# Altium PCB PCB1.2.PcbDoc (part 1 of 2)
Units mil, origin at the board's own origin, x right, y up, seen from the top; angles counter-clockwise.
Board outline 1692.91 x 1692.91 mil, 4 copper layers (Top Layer, Mid-Layer 1, Mid-Layer 2, Bottom Layer); 152 components, 107 nets, 552 pads, 236 vias.
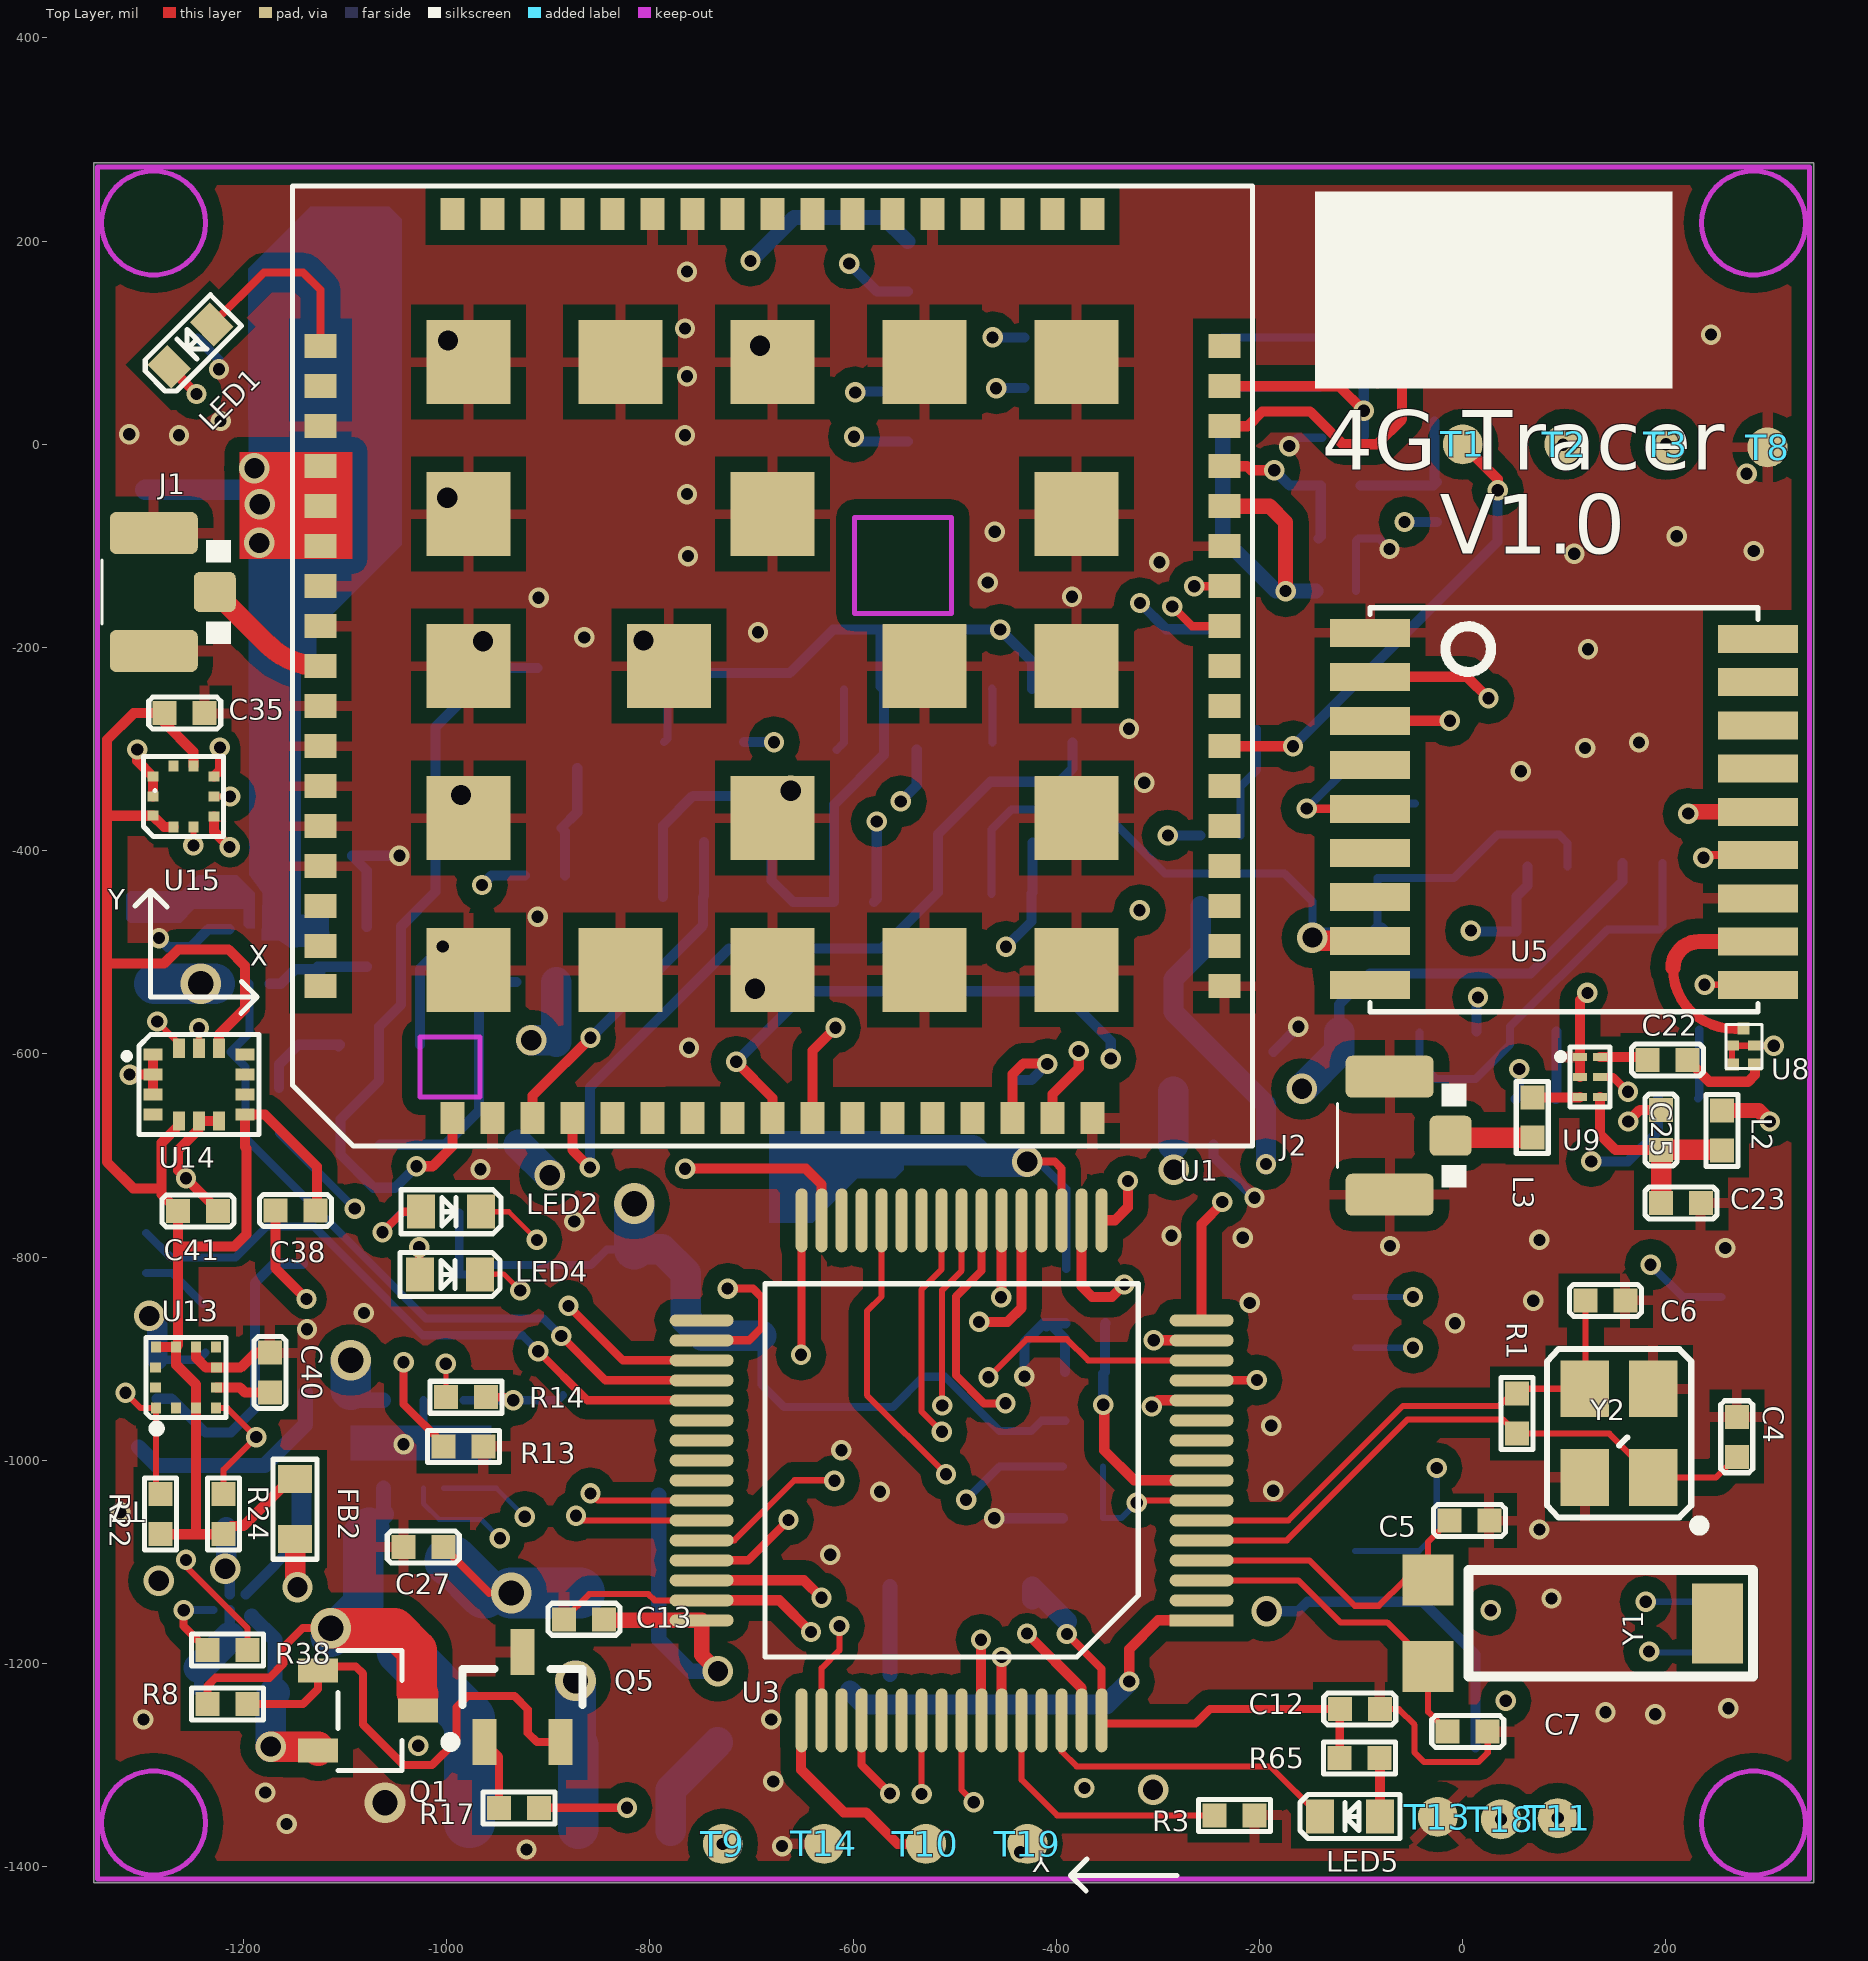
[diagram p0: Top Layer view]
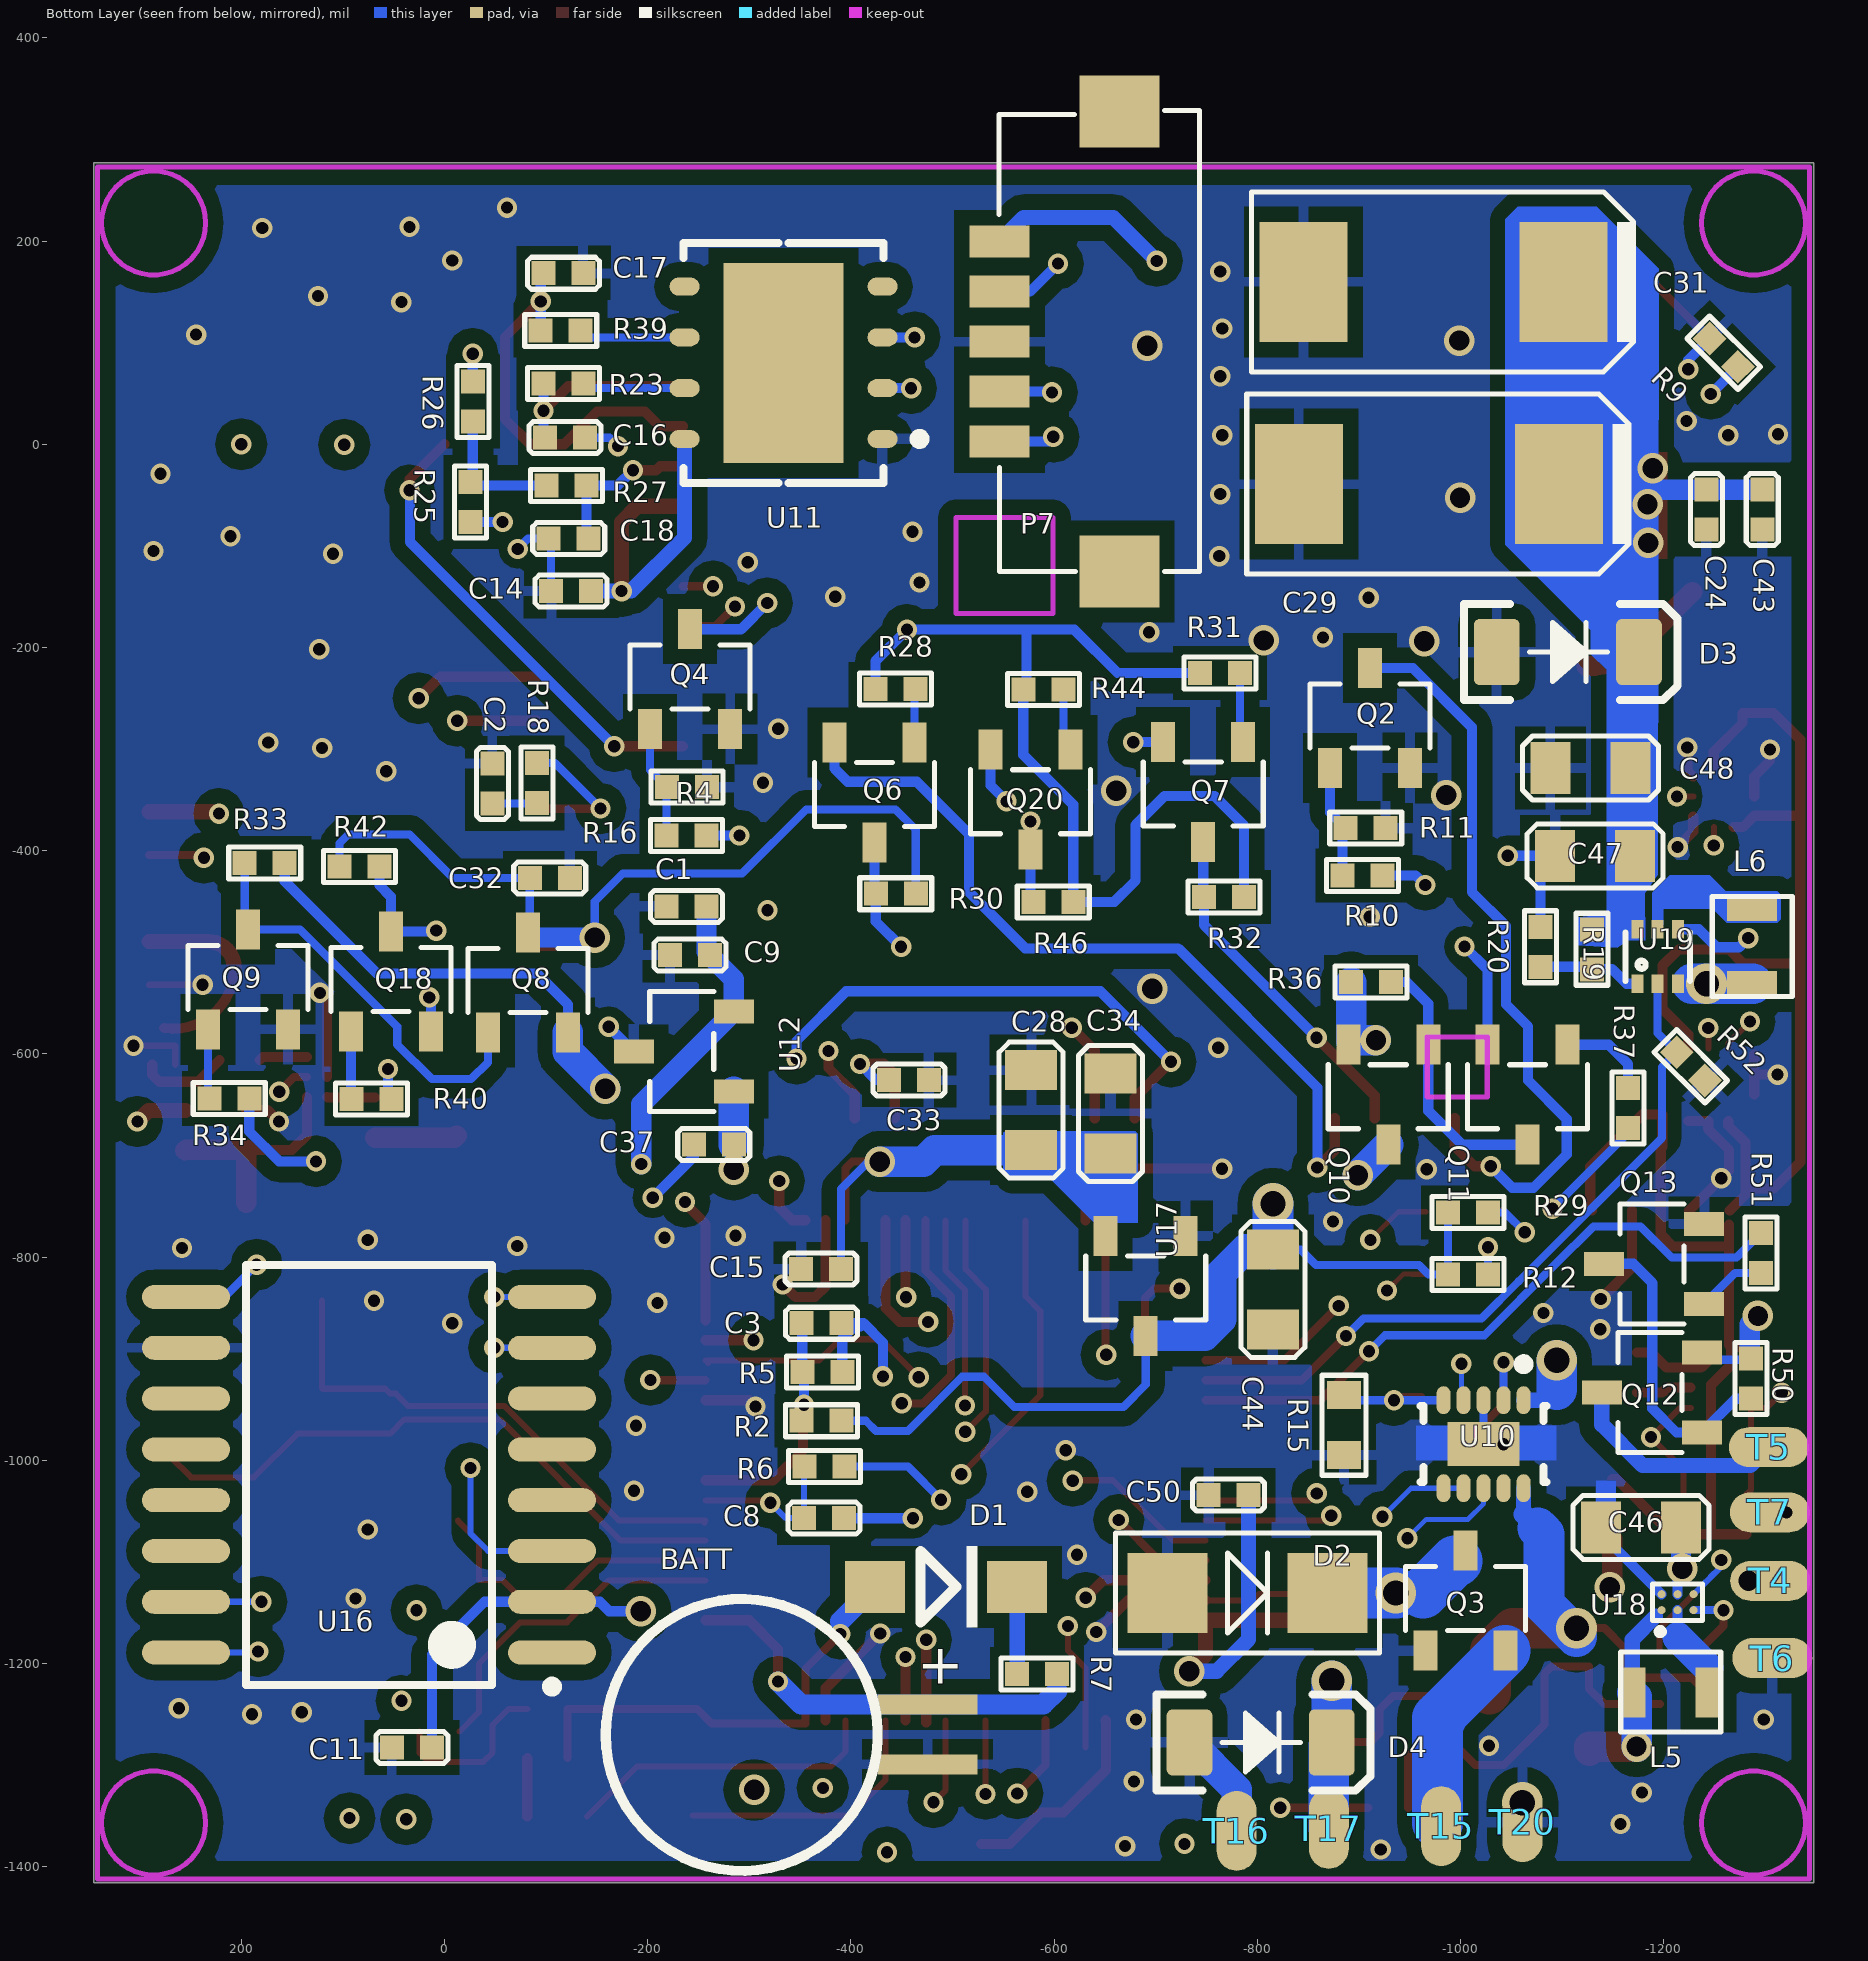
[diagram p1: Bottom Layer view, seen from below]
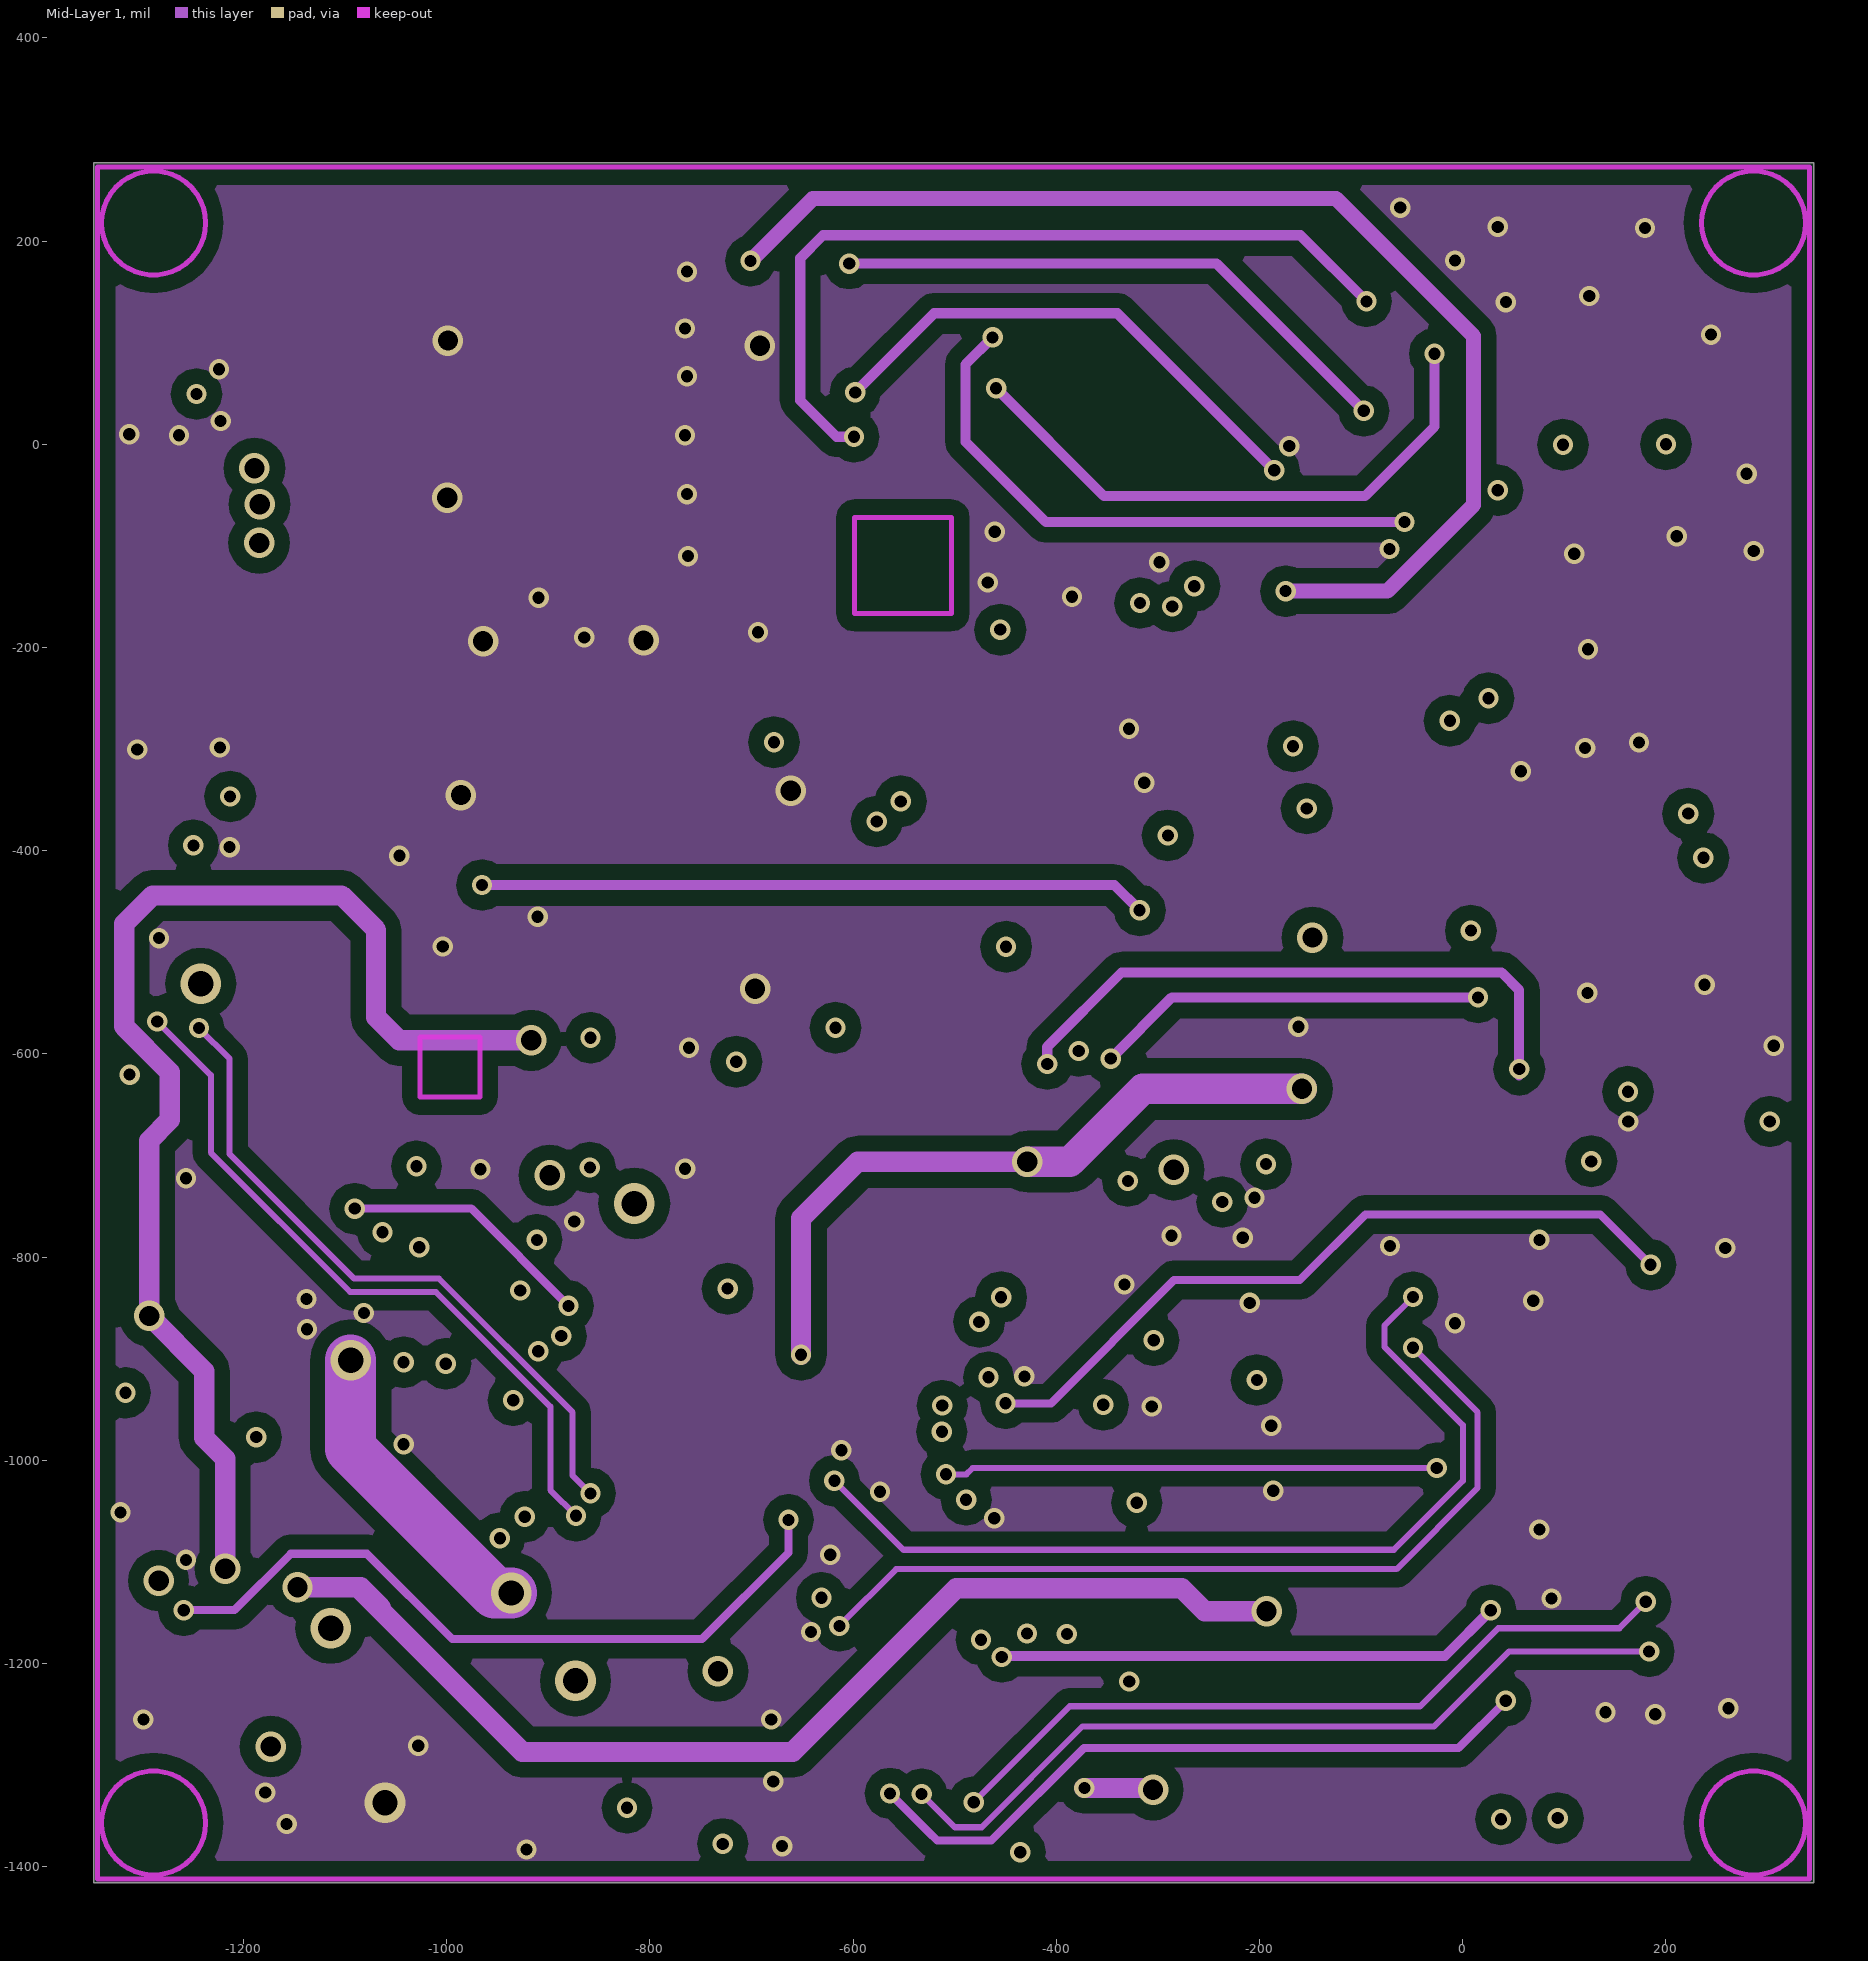
[diagram p2: Mid-Layer 1]
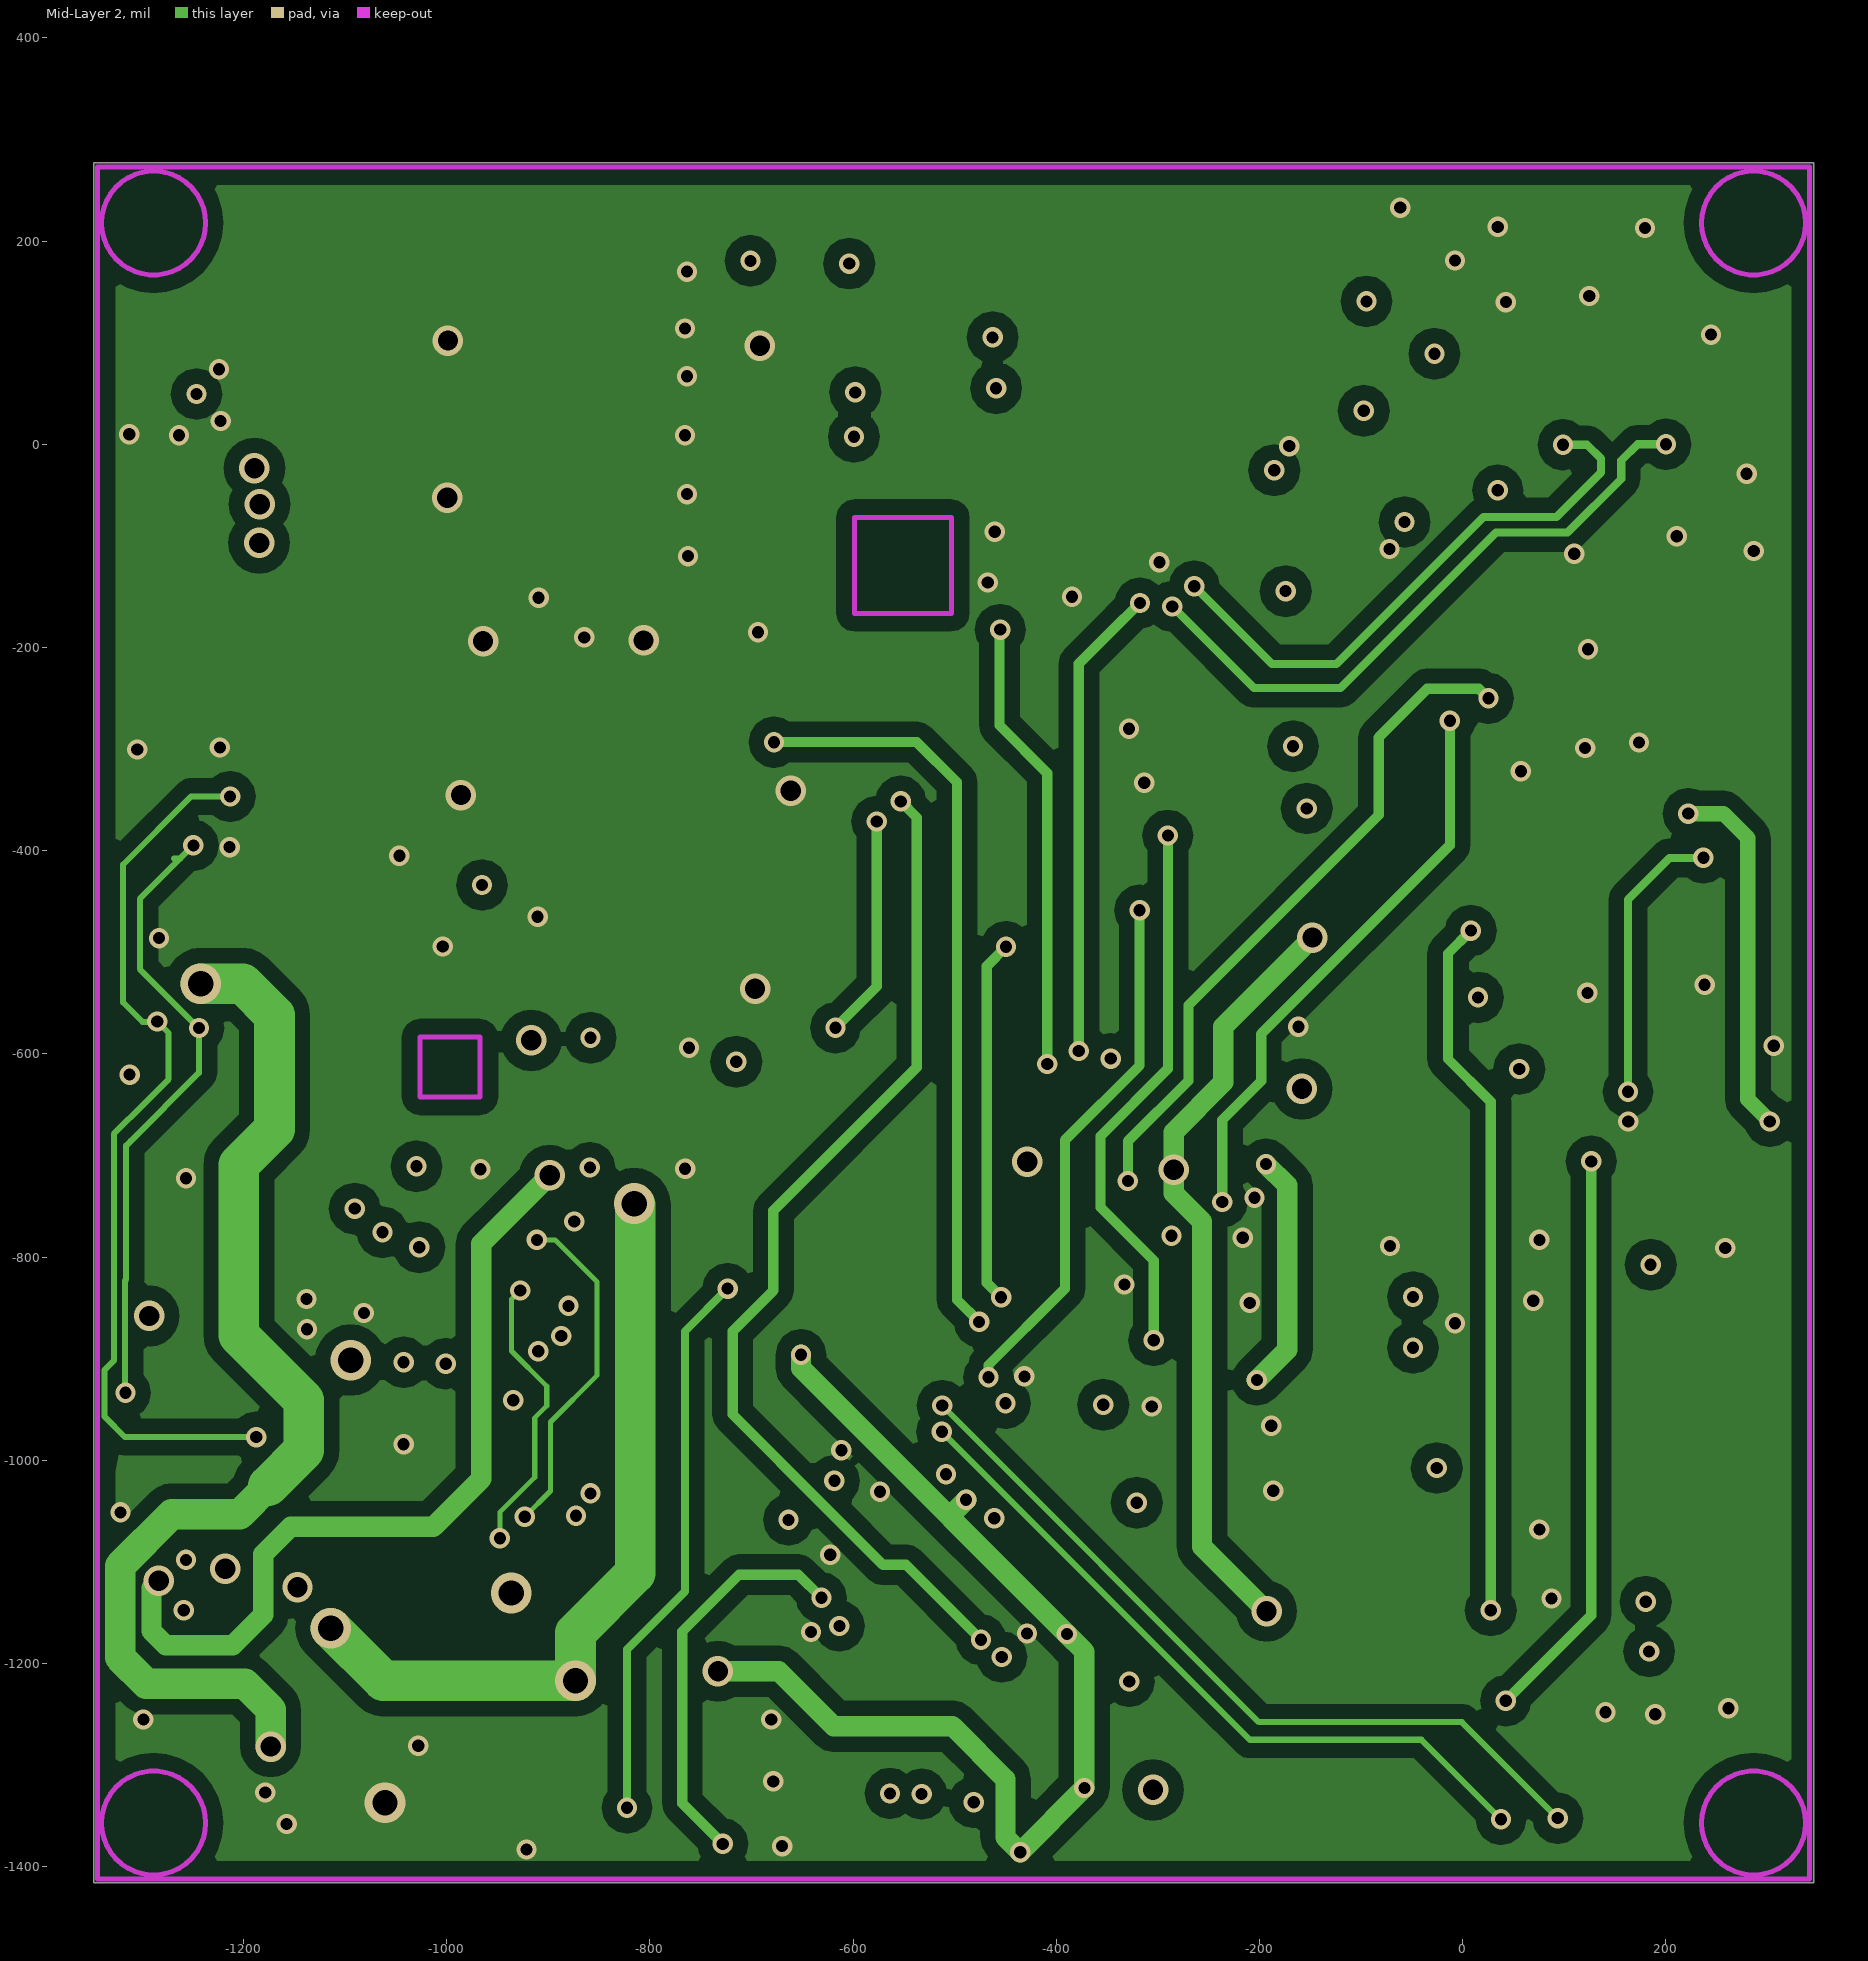
[diagram p3: Mid-Layer 2]

## Layer stack, top to bottom
Top Layer: signal copper 1.4
Dielectric: core 12.6, FR-4, Dk 4.8
Mid-Layer 1: signal copper 1.4
Dielectric: prepreg 12.6, FR-4, Dk 4.8
Mid-Layer 2: signal copper 1.4
Dielectric: core 12.6, FR-4, Dk 4.8
Bottom Layer: signal copper 1.4

## Board outline
-1347.58,-1416.02 -1347.58,276.89 345.33,276.89 345.33,-1416.02

## Design rules (kind name [scope] priority, off if disabled: settings)
Clearance [InPolygon  And InNet(AGND)] p1: gap=15
Clearance Clearance_1 [All] p2: gap=5
HoleToHoleClearance [All] p1: gap=5 allowstackedmicrovias=TRUE
MinimumSolderMaskSliver [All] p1: minsoldermaskwidth=1
PolygonConnect PolygonConnect_1 [InNet('AGND') And IsVia] p1: connectstyle=Direct reliefconductorwidth=10 reliefentries=4 polygonreliefangle="90 Angle"
PolygonConnect [All] p2: connectstyle=Relief reliefconductorwidth=10 reliefentries=4 polygonreliefangle="90 Angle"
RoutingVias [All] p1: holewidth=28 width=50 viastyle="Through Hole" minholewidth=28 minwidth=50 maxholewidth=28 maxwidth=50
SilkToSilkClearance [All] p1: silktosilkclearance=5
SilkscreenOverComponentPads [All] p1: minsilkscreentomaskgap=1
SolderMaskExpansion [All] p1: expansion=4
Width [All] p1: maxlimit=200 minlimit=5 preferedwidth=10
24 further rules are at their usual default settings.

## Classes and differential pairs
component class sensors: C35 C38 C40 C41 FB2 R22 R24 U13 U14 U15
component class power: C1 C27 C28 C34 C37 C44 C46 C47 C48 D2 D4 L5 L6 LED2 LED4 Q1 Q3 Q5 Q8 Q9 Q10 Q11 Q12 Q13 R8 R12 R13 R14 R15 R17 R19 R20 R29 R33 R34 R36 R37 R38 R50 R51 R52 T4 T5 T6 T7 T15 T16 T17 T20 U10 U12 U17 U18 U19
component class GPS&&lte: C14 C16 C17 C18 C22 C24 C25 C26 C29 C30 C31 C33 C43 D3 J1 J2 L3 LED1 P7 Q2 Q6 Q7 Q18 Q19 Q20 Q21 R9 R10 R11 R23 R25 R26 R27 R28 R30 R31 R32 R39 R40 R41 R42 R43 R44 R45 R46 R47 T1 T2 T3 T8 U8 U9 U11
component class CPU: BATT C3 C4 C5 C6 C7 C8 C9 C11 C12 C13 C15 C50 D1 LED5 R1 R2 R3 R5 R6 R7 R65 T9 T10 T11 T13 T14 T18 T19 U3 U16 U? Y1 Y2
component class 4G: C2 C23 C32 L2 Q4 R4 R16 R18 U1 U5 U?

## Components (designator, comment, footprint, x,y, rotation, side; value= is the part's Value field where it differs from the comment)
BATT "MS621FE" MS621FE -475.57,-1269.81 r180 bottom
C1 "0.1uF/25V" 0402c -257.87,-454.74 r0 bottom
C2 "4.7uF/10V" 0402c -47.09,-314.22 r270 bottom
C3 "0.1uF/25v" 0402c -351.58,-865.06 r180 bottom
C4 "22pF" 0402c 269.7,-957.13 r270 top
C5 "6pF" 0402c -13.19,-1059.37 r0 top
C6 "22pF" 0402c 160.07,-842.55 r180 top
C7 "6pF" 0402c -14.78,-1267.08 r0 top
C8 "0.1uF/25V" 0402C -393.44,-1056.96 r0 bottom
C9 "0.1uF/25V" 0402C -221.79,-502.85 r180 bottom
C11 "0.1uF/25V" 0402C 51.78,-1282.7 r180 bottom
C12 "0.1uF/25V" 0402C -81.68,-1244.83 r180 top
C13 "0.1uF/25V" 0402C -884.59,-1156.45 r0 top
C14 "0.1uF" 0402C -104.98,-144.5 r180 bottom
C15 "0.1uF/25V" 0402C -350.96,-811.75 r180 bottom
C16 "10pF/NC" 0402C -138.35,6.52 r0 bottom
C17 "10pF/NC" 0402C -136.66,168.4 r0 bottom
C18 "10pF/NC" 0402C -102.61,-92.86 r180 bottom
C22 "36pF" 0402c 221.3,-606.07 r180 top
C23 "4.7uF" 0402c 234.38,-746.83 r180 top
C24 "10pF" 0402C -1242.06,-84.03 r90 bottom
C25 "0.1uF" 0402C 195.21,-655.1 r270 top
C27 "1uF/25V" 0402C -1003.45,-1085.29 r180 top
C28 "22uF/10V" 0805C -577.46,-694.71 r90 bottom
C29 "1000uF" 7343 -1096.76,-39.16 r0 bottom
C31 "1000uF" 7343 -1101.38,159.89 r0 bottom
C32 "10uF/10V" 0402C -123.35,-426.85 r0 bottom
C33 "0.1uF" 0402C -476.85,-625.78 r0 bottom
C34 "22uF/10V" 0805C -655.57,-698 r90 bottom
C35 "0.1uF/25V" 0402C -1238.21,-264.59 r180 top
C37 "0.1uF/25V" 0402c -284.73,-689.17 r0 bottom
C38 "0.1uF/25V" 0402C -1168.7,-754.17 r0 top
C40 "22pF" 0402c -1173.9,-933.37 r90 top
C41 "0.1uF/25V" 0402C -1225.02,-754.71 r180 top
C43 "33pF" 0402C -1297.06,-84.03 r90 bottom
C44 "22uF/10V" 0805C -815.28,-792.34 r270 bottom
C46 "22uF/10V" 0805C -1216.98,-1065.97 r0 bottom
C47 "22uF/10V" 0805C -1171.93,-405.02 r0 bottom
C48 "22uF/10V" 0805C -1167.25,-318.61 r0 bottom
C50 "0.1uF/25V" 0402C -751.95,-1034.23 r180 bottom
D1 "1N4148" DIODE_SOP -423.66,-1124.52 r180 bottom
D2 "SMAJ12CA" SMA -711.64,-1130.56 r180 bottom
D3 "DIODE_SCHOTTKY_0" LL-34(D1206) -1105.75,-204.44 r180 bottom
D4 "DIODE_SCHOTTKY_0" LL-34(D1206) -803.28,-1277.71 r180 bottom
FB2 "10R/1A" 0603R -1149.27,-1077.67 r90 top
J1 "IPEX" RF-UFL -1288.35,-145.35 r90 top
J2 "IPEX" RF-UFL -72.01,-680.51 r90 top
L2 "27nH" 0402R 255.01,-655.65 r270 top
L3 "LQW15A" 0402R 68.41,-643.04 r270 top
L5 "SRP4020TA-2R2M" L2520 -1169.15,-1228.55 r180 bottom
L6 "SRP4020TA-1R0M" L2520 -1286.8,-456.47 r270 bottom
LED1 "LED" 0603LED -1231.31,117.99 r225 top
LED2 "LED" 0603LED -1025.27,-755.35 r0 top
LED4 "LED" 0603LED -1026.16,-817.15 r0 top
LED5 "LED" 0603LED -81.42,-1350.52 r180 top
P7 "Header 5" 5×1.25mmSMT -546.3,2.66 r90 bottom
Q1 "WNM2016-3/TR" sot23-3 -1126.58,-1207.02 r180 top
Q2 "MMBT3904" SOT23-3 -871.62,-318.53 r270 bottom
Q3 "Si2369DS" sot23-3 -965.42,-1187.29 r270 bottom
Q4 "MMBT3904" SOT23-3 -202.4,-280.38 r270 bottom
Q5 "SOT23-3" SOT95P240-3N -925.58,-1233.02 r90 top
Q6 "MMBT3904" SOT23-3 -462.79,-293.42 r90 bottom
Q7 "MMBT3904" SOT23-3 -786.19,-293.16 r90 bottom
Q8 "Si2369DS" sot23-3 -42.76,-578.76 r270 bottom
Q9 "S8050" SOT23-3 232.77,-575.8 r270 bottom
Q10 "Si2369DS" sot23-3 -968.32,-590.95 r90 bottom
Q11 "S8050" SOT23-3 -1105.21,-590.95 r90 bottom
Q12 "Si2369DS" sot23-3 -1237.57,-972.6 r180 bottom
Q13 "S8050" SOT23-3 -1239.89,-845.97 r180 bottom
Q18 "MMBT3904" SOT23-3 92.15,-577.82 r270 bottom
Q20 "MMBT3904" SOT23-3 -616.15,-300.63 r90 bottom
R1 "1MR" 0402R 53.39,-973.71 r90 top
R2 "10K/1%" 0402R -390.95,-961.06 r0 bottom
R3 "100K" 0402R -244.15,-1349.45 r0 top
R4 "47K" 0402R -219.17,-337.27 r180 bottom
R5 "10K/1%" 0402R -352.21,-913.06 r180 bottom
R6 "10K" 0402R -393.74,-1006.04 r0 bottom
R7 "470" 0402R -563.66,-1210.52 r180 bottom
R8 "4K7" 0402R -1235.58,-1240.02 r0 top
R9 "1K" 0402R -1273.07,76.23 r45 bottom
R10 "4.7K" 0402R -883.74,-424.24 r180 bottom
R11 "47K" 0402R -887.09,-377.67 r180 bottom
R12 "1K/1%" 0402R -987.76,-817.15 r180 bottom
R13 "3.95K/1%" 0402R -1003.17,-986.41 r0 top
R14 "21.5k/1%" 0402R -961.55,-937.9 r180 top
R15 "RTH103AT" 0603R -885.49,-995.01 r90 bottom
R16 "4.7K" 0402R -218.7,-384.95 r180 bottom
R17 "4K7" 0402R -948.58,-1342.02 r0 top
R18 "10K" 0402R -91.14,-313.51 r270 bottom
R19 "534K/1%" 0402R -1129.48,-477.32 r270 bottom
R20 "100K/1%" 0402R -1078.73,-474.85 r270 bottom
R22 "4.7K" 0402R -1281.6,-1072.72 r90 top
R23 "10R" 0402R -97.49,59.69 r180 bottom
R24 "4.7K" 0402R -1219.6,-1033.35 r270 top
R25 "0R" 0402R -25.52,-76.52 r90 bottom
R26 "0R" 0402R -27.89,61.86 r270 bottom
R27 "10R" 0402R -139.72,-40.44 r0 bottom
R28 "4.7K" 0402R -463.46,-240.63 r0 bottom
R29 "1K/1%" 0402R -987.76,-756.15 r180 bottom
R30 "10K" 0402R -424.51,-442.32 r180 bottom
R31 "4.7K" 0402R -782.85,-225.07 r0 bottom
R32 "4.7K" 0402R -747.66,-445.55 r180 bottom
R33 "4K7" 0402R 157.24,-412.12 r0 bottom
R34 "4K7" 0402R 231.51,-643.8 r180 bottom
R36 "4K7" 0402R -892.3,-529.38 r180 bottom
R37 "4K7" 0402R -1165.03,-633.64 r270 bottom
R38 "10K/1%" 0402R -1195.98,-1186.52 r180 top
R39 "10R" 0402R -94.76,112.2 r180 bottom
R40 "4.7K" 0402R 91.51,-644.49 r180 bottom
R42 "10K" 0402R 63.87,-415.57 r0 bottom
R44 "4.7K" 0402R -609.11,-241.36 r0 bottom
R46 "4.7K" 0402R -579.54,-450.37 r180 bottom
R50 "4K7" 0402R -1285.84,-900 r270 bottom
R51 "4K7" 0402R -1295.73,-815.68 r90 bottom
R52 "10K/1%" 0402R -1240.67,-626.09 r45 bottom
R65 "1K" 0402R -81.75,-1293.1 r180 top
T1 "TPD" TPD#1 0,0 r90 top
T2 "TPD" TPD#2 73.67,-3 r90 top
T3 "TPD" TPD#3 132.33,-3 r90 top
T4 "TPD" TP#1 -1304.86,-1118.62 r180 top
T5 "TPD" TP#1 -1303.53,-987 r180 top
T6 "TPD" TP#1 -1307.01,-1194.59 r0 top
T7 "TPD" TP#1 -1304.42,-1051.19 r180 top
T8 "TPD" TPD#4 191,-3 r90 top
T9 "TPD" TPd#1 -728.35,-1377.55 r90 top
T10 "TPD" TPd#2 -617.51,-1379.33 r270 top
T11 "TPD" TPd#1 93.44,-1352.16 r135 top
T13 "TPD" TPd#1 -24.55,-1350.9 r135 top
T14 "TPD" TPd#3 -669.91,-1379.76 r270 top
T15 "TPD" TP#1 -980.96,-1360.07 r270 top
T16 "TPD" TP#1 -779.68,-1364.69 r270 top
T17 "TPD" TP#2 -870.44,-1362.68 r270 bottom
T18 "TPD" TPd#1 37.57,-1353.31 r135 top
T19 "TPD" TPd#4 -560.97,-1380.16 r135 top
T20 "TPD" TP#1 -1061.08,-1355.95 r270 top
U1 "A7670" A7670 -679.35,-218.39 r90 top
U3 "stm32l412r8t6" LQFP-64 -257.01,-1157.48 r180 top
U5 "SIM868E/SIM68" SIM68MB -91.14,-185.51 r0 top
U8 "SAFFB1G56KB0F0A" SAFFB1G56KB0F0A 276.31,-575.19 r270 top
U9 "AW5005DNR" AW5005 125.36,-622.78 r0 top
U10 "bq24210" QFN50P200X300X80-10N -1022.79,-984.15 r270 bottom
U11 "SLI76CF3600P" QFN127P500X600X80-8N -333.75,80.27 r0 bottom
U12 "REF3025AIDBZR" SOT23-3 -284.73,-637.17 r180 bottom
U13 "LIS2MDL" LIS2MDL -1256.56,-918.65 r90 top
U14 "LSM6DS3TR" LSM6DS3TR-C -1243.94,-630.24 r0 top
U15 "BMP388" BMP388 -1259.21,-346.59 r180 top
U16 "MX25L51245GMI-10G" SOP127P1030X239-16N 74.3,-1014.25 r0 bottom
U17 "MCP33-30" SOT23-3 -729.58,-779.02 r90 bottom
U18 "TPS610997YFFR" TPS610997YFFR -1213.65,-1139.63 r90 bottom
U19 "TPS61023" SOT563-6 -1194.01,-504.33 r180 bottom
Y1 "MC-146 32.768K/6pF" 32.768K -34.18,-1202.91 r90 top
Y2 "8MHz" OSCILLATOR-3.2X2.5 154.07,-973.55 r90 top

## Footprints (in the part's own frame and the unit in brackets; to place one, negate y for a bottom-side part, rotate by r counter-clockwise, add the part's x,y. Pads: shape width x height; smd on the part's side, far side on the other; paste and mask are expansions set on the pad)
5×1.25mmSMT [mm]
  rect 1.8x2 smd: 0(-3.25,-3) 0(8.25,-3)
  rect 0.8x1.5 smd: 1(0,0) 2(1.25,0) 3(2.5,0) 4(3.75,0) 5(5,0)
  round 0.5 on Bottom Overlay: ""(-0.875,0.432)
  silkscreen extent -3.25,-5 8.28,0.02
32.768K [mil]
  rect 50x50 smd: 1(0,0) 2(85,0)
  rect 78.74x50 smd: 3(42.13,-285)
  silkscreen extent -10,-320 95,-40
0402c [mm]
  rect 0.6x0.6 smd: 1(0,0) 2(1,0)
  silkscreen extent -0.4,-0.4 1.4,0.4
0402C [mm]
  rect 0.6x0.6 smd: 1(0,0) 2(1,0)
  silkscreen extent -0.4,-0.4 1.4,0.4
0402R [mm]
  rect 0.6x0.6 smd: 1(0,0) 2(1,0)
  silkscreen extent -0.4,-0.4 1.4,0.4
0603LED [mm]
  rect 0.7x0.85 smd: 1(0,0) 2(1.5,0)
  silkscreen extent -0.5,-0.55 2,0.55
0603R [mm]
  rect 0.7x0.85 smd: 1(0,0) 2(1.5,0)
  silkscreen extent -0.5,-0.55 2,0.55
0805C [mm]
  rect 1x1.3 smd: 1(0,0) 2(2,0)
  silkscreen extent -0.7,-0.8 2.7,0.8
7343 [mm]
  rect 2.2x3 smd: 1(0,0) 2(6.5,0)
  silkscreen extent -1.75,-2.25 7.8,2.25
A7670 [mm]
  rect 0.8x0.6 smd: 1(-11.3,8) 2(-11.3,7) 3(-11.3,6) 4(-11.3,5) 5(-11.3,4) 6(-11.3,3) 7(-11.3,2) 8(-11.3,1) 9(-11.3,0) 10(-11.3,-1) 11(-11.3,-2) 12(-11.3,-3) 13(-11.3,-4) 14(-11.3,-5) 15(-11.3,-6) 16(-11.3,-7) 17(-11.3,-8) 35(11.3,-8) 36(11.3,-7) 37(11.3,-6) 38(11.3,-5) 39(11.3,-4) 40(11.3,-3) 41(11.3,-2) 42(11.3,-1) 43(11.3,0) 44(11.3,1) 45(11.3,2) 46(11.3,3) 47(11.3,4) 48(11.3,5) 49(11.303,6) 50(11.3,7) 51(11.3,8)
  rect 0.6x0.8 smd: 18(-8,-11.3) 19(-7,-11.3) 20(-6,-11.3) 21(-5,-11.3) 22(-4,-11.3) 23(-3,-11.3) 24(-2,-11.3) 25(-1,-11.3) 26(0,-11.3) 27(1,-11.3) 28(2,-11.3) 29(3,-11.3) 30(4,-11.3) 31(5,-11.3) 32(6,-11.3) 33(7,-11.3) 34(8,-11.3) 52(8,11.3) 53(7,11.3) 54(6,11.3) 55(5,11.3) 56(4,11.3) 57(3,11.3) 58(2,11.3) 59(1,11.3) 60(0,11.3) 61(-1,11.3) 62(-2,11.3) 63(-3,11.3) 64(-4,11.3) 65(-5,11.3) 66(-6,11.3) 67(-7,11.3) 68(-8,11.3)
  rect 2.1x2.1 smd: 69(-7.6,7.6) 70(-7.6,3.8) 71(-7.6,0) 72(-7.6,-3.8) 73(-7.6,-7.6) 74(-3.8,-7.6) 75(0,-7.6) 76(3.8,-7.6) 77(7.6,-7.6) 78(7.6,-3.8) 79(7.6,0) 80(7.6,3.8) 81(7.6,7.6) 82(3.8,7.6) 83(0,7.6) 84(-3.8,7.6) 85(-3.8,0) 86(0,-3.8) 87(3.8,0) 88(0,2.591)
  Keep-Out Layer lines w0.127: 1.321,-2.045 3.721,-2.045 ; 1.321,-2.07 1.321,-4.47 3.721,-4.47 3.721,-2.07 ; -10.77,8.814 -10.77,7.314 -9.27,7.314 -9.27,8.814 -10.77,8.814
  silkscreen extent -12,-12 12,12
AW5005 [mm]
  rect 0.35x0.2 smd: 1(-0.25,0.5) 2(-0.25,0) 3(-0.25,-0.5) 4(0.25,-0.5) 5(0.25,0) 6(0.25,0.5)
  silkscreen extent -0.77,-0.75 0.5,0.75
BMP388 [mm]
  rect 0.25x0.275 smd: 1(0.25,0.763) 2(-0.25,0.763) 6(-0.25,-0.763) 7(0.25,-0.763)
  rect 0.275x0.25 smd: 3(-0.762,0.5) 4(-0.762,0) 5(-0.762,-0.5) 8(0.763,-0.5) 9(0.763,0) 10(0.763,0.483)
  silkscreen extent -1,-1 1,1
DIODE_SOP [mm]
  rect 1.5x1.3 smd: 1(0,0) 2(3.556,0)
  silkscreen extent 1.14,-1.02 2.56,1.02
L2520 [mm]
  rect 0.65x1.25 smd: 1(0,0) 2(1.9,0)
  silkscreen extent -0.29,-0.99 2.21,1.01
LIS2MDL [mm]
  rect 0.275x0.25 smd: 1(-0.763,0.75) 2(-0.763,0.25) 3(-0.763,-0.25) 4(-0.763,-0.75) 7(0.763,-0.75) 8(0.763,-0.25) 9(0.763,0.25) 10(0.763,0.75)
  rect 0.25x0.275 smd: 5(-0.25,-0.763) 6(0.25,-0.763) 11(0.25,0.762) 12(-0.25,0.762)
  silkscreen extent -1.35,-1 1,1
LL-34(D1206) [mil]
  rrect25% 45x65 smd: 1(-70,0) 2(70,0)
  silkscreen extent -102,-47 108,47, body extent -70,-28 68,30, height 56
LQFP-64 [mm]
  rect 1.6x0.3 smd: 1(0,0)
  oval 1.6x0.3 smd: 2(0,-0.5) 3(0,-1) 4(0,-1.5) 5(0,-2) 6(0,-2.5) 7(0,-3) 8(0,-3.5) 9(0,-4) 10(0,-4.5) 11(0,-5) 12(0,-5.5) 13(0,-6) 14(0,-6.5) 15(0,-7) 16(0,-7.5) 33(12.5,-7.5) 34(12.5,-7) 35(12.5,-6.5) 36(12.5,-6) 37(12.5,-5.5) 38(12.5,-5) 39(12.5,-4.5) 40(12.5,-4) 41(12.5,-3.5) 42(12.5,-3) 43(12.5,-2.5) 44(12.5,-2) 45(12.5,-1.5) 46(12.5,-1) 47(12.5,-0.5) 48(12.5,0)
  oval 0.3x1.6 smd: 17(2.5,-10) 18(3,-10) 19(3.5,-10) 20(4,-10) 21(4.5,-10) 22(5,-10) 23(5.5,-10) 24(6,-10) 25(6.5,-10) 26(7,-10) 27(7.5,-10) 28(8,-10) 29(8.5,-10) 30(9,-10) 31(9.5,-10) 32(10,-10) 49(10,2.5) 50(9.5,2.5) 51(9,2.5) 52(8.5,2.5) 53(8,2.5) 54(7.5,2.5) 55(7,2.5) 56(6.5,2.5) 57(6,2.5) 58(5.5,2.5) 59(5,2.5) 60(4.5,2.5) 61(4,2.5) 62(3.5,2.5) 63(3,2.5) 64(2.5,2.5)
  silkscreen extent 1.59,-8.41 10.91,0.91
LSM6DS3TR-C [mm]
  rect 0.48x0.3 smd: 1(-1.15,0.75) 2(-1.15,0.25) 3(-1.15,-0.25) 4(-1.15,-0.75) 8(1.15,-0.75) 9(1.15,-0.25) 10(1.15,0.25) 11(1.15,0.75)
  rect 0.3x0.48 smd: 5(-0.5,-0.91) 6(0,-0.91) 7(0.5,-0.91) 12(0.5,0.91) 13(0,0.91) 14(-0.5,0.91)
  silkscreen extent -1.83,-1.25 1.5,1.25
MS621FE [mm]
  rect 2.5x0.5 smd: 1(0,-0.749) 2(0,0.749)
  silkscreen extent -8.05,-3.41 -1.25,3.39
OSCILLATOR-3.2X2.5 [mil] "OSCILLATOR-3.2X2.5"
  rect 56x48 smd: 1(-43.31,-33.46) 2(44,-33.46) 3(44,34) 4(-43.31,34)
  silkscreen extent -95,-83 83,71
QFN50P200X300X80-10N [mm] "QFN, 10-Leads, Body 2.9x1.9mm (max), Pitch 0.50mm, IPC Medium Density"
  oval 0.7x0.35 smd: 1(-1.1,1) 2(-1.1,0.5) 3(-1.1,0) 4(-1.1,-0.5) 5(-1.1,-1) 6(1.1,-1) 7(1.1,-0.5) 8(1.1,0) 9(1.1,0.5) 10(1.1,1)
  rect 1.1x1.8 smd: 11(0,0)
  silkscreen extent -2.12,-1.58 0.95,1.58, body extent -0.95,-1.45 0.95,1.45, height 0.8
QFN127P500X600X80-8N [mm] "QFN, 8-Leads, Body 6.0x5.0mm (max), Pitch 1.27mm, IPC Medium Density"
  oval 0.75x0.45 smd: 1(-2.475,1.905) 2(-2.475,0.635) 3(-2.475,-0.635) 4(-2.475,-1.905) 5(2.475,-1.905) 6(2.475,-0.635) 7(2.475,0.635) 8(2.475,1.905)
  rect 3x5 smd: 9(0,0)
  silkscreen extent -3.52,-3 2.5,3
RF-UFL [mm]
  rrect30% 1x1.05 smd: 1(0,-1.525)
  rrect30% 1.05x2.2 smd: 2(-1.475,0) 2(1.475,0)
  silkscreen extent -1.3,-1.93 1.3,1.3, body extent -1.7,-1.55 1.7,1.55, height 1.25
SAFFB1G56KB0F0A [mm]
  rect 0.3x0.3 smd: 1(0,0)
  rect 0.25x0.35 smd: 2(0.425,-0.287) 5(0.425,0.288)
  rect 0.3x0.35 smd: 3(0.9,-0.287) 4(0.9,0.288)
  silkscreen extent -0.1,-0.44 1,0.46
SIM68MB [mm]
  rect 2x0.7 smd: 1(0,0) 2(0,-1.1) 3(0,-2.2) 4(0,-3.3) 5(0,-4.4) 6(0,-5.5) 7(0,-6.6) 8(0,-7.7) 9(0,-8.8) 10(9.7,-8.8) 11(9.7,-7.719) 12(9.7,-6.638) 13(9.7,-5.557) 14(9.7,-4.476) 15(9.7,-3.395) 16(9.7,-2.314) 17(9.7,-1.233) 18(9.7,-0.152)
  silkscreen extent 0,-9.47 9.7,0.63
SMA [mm]
  rect 2x2 smd: 1(0,0) 2(4,0)
  silkscreen extent -1.3,-1.5 5.3,1.5
SOP127P1030X239-16N [mm] "SOP, 16-Leads, Body 10.5x7.6mm (max), Pitch 1.27mm, IPC Medium Density"
  oval 2.2x0.6 smd: 1(-4.575,4.445) 2(-4.575,3.175) 3(-4.575,1.905) 4(-4.575,0.635) 5(-4.575,-0.635) 6(-4.575,-1.905) 7(-4.575,-3.175) 8(-4.575,-4.445) 9(4.575,-4.445) 10(4.575,-3.175) 11(4.575,-1.905) 12(4.575,-0.635) 13(4.575,0.635) 14(4.575,1.905) 15(4.575,3.175) 16(4.575,4.445)
  silkscreen extent -4.7,-5.25 3.07,5.42, body extent -3.8,-5.25 3.8,5.25, height 2.39
sot23-3 [mm]
  rect 1x0.6 smd: 1(0,0) 2(0,2) 3(-2.5,1)
  silkscreen extent -2.1,-0.5 -0.5,2.5
SOT23-3 [mm]
  rect 1x0.6 smd: 1(0,0) 2(0,2) 3(-2.5,1)
  silkscreen extent -2.1,-0.5 -0.5,2.5
SOT95P240-3N [mm] "SOT23, 3-Leads, Body 2.9x1.3mm, Pitch 0.95mm, Lead Span 2.4mm, IPC Medium Density"
  rect 1.15x0.6 smd: 1(-1.125,0.95) 2(-1.125,-0.95) 3(1.125,0)
  silkscreen extent -1.25,-1.5 0.7,1.92, body extent -0.7,-1.5 0.7,1.5, height 1.14
SOT563-6 [mil] "SOT563-6"
  rect 12x18 smd: 1(-19.68,-26.57) 2(0,-26.57) 3(20,-26.57) 4(20,27) 5(0,27) 6(-19.69,27)
  silkscreen extent -31,-24 32,24
TP#1 [mm]
  oval 2x1 smd far side: 1(0,0)
TP#2 [mm]
  oval 2x1 smd: 1(0,0)
TPD#1 [mm]
  round 1 smd: 1(0,0)
TPD#2 [mm]
  round 1 smd: 1(0.076,-0.669)
TPD#3 [mm]
  round 1 smd: 1(0.076,-1.719)
TPD#4 [mm]
  round 1 smd: 1(0,-2.769)
TPd#1 [mm]
  round 1 smd: 1(0,0)
TPd#2 [mm]
  round 1 smd: 1(-0.045,2.265)
TPd#3 [mm]
  round 1 smd: 1(-0.056,1.056)
TPd#4 [mm]
  round 1 smd: 1(-2.335,-2.429)
TPS610997YFFR [mm]
  round 0.2 smd: A1(-0.2,0.4) A2(0.2,0.4) B1(-0.2,0) B2(0.2,0) C1(-0.2,-0.4) C2(0.2,-0.4)
  silkscreen extent -0.77,-0.63 0.46,0.63

## Part data
BATT: library part SBatery
C1 C2 C22 C23 C37: library part Cap, "Capacitor"
C3 C4 C5 C6 C7 C8 C9 C11 C12 C13 C14 C15 C16 C17 C18 C24 C25 C27 C28 C32 C33 C34 C35 C38 C40 C41 C43 C44 C46 C47 C48 C50: library part CAP, "Capacitor"
C29 C31: library part "Cap Pol3", "Polarized Capacitor (Surface Mount)"
D1: library part D
D2: library part DIODE_SCHOTTKY_0
FB2: library part INDUCTOR1
J1 J2: library part ANT
L2 L3 L5 L6: library part INDUCTOR_1
P7: "Header, 5-Pin"
Q1 Q3 Q8 Q10 Q12: library part NCE4060K, "NMOSFET"
Q2 Q4 Q9 Q11 Q13: library part 2N1069_1
Q5: library part PNP, "PNP Bipolar Transistor"
Q6 Q7 Q18 Q20: library part NPN
R1: library part Res3, "Resistor"
R2 R4 R5 R8 R9 R10 R11 R12 R13 R14 R15 R16 R17 R18 R19 R20 R22 R23 R24 R25 R26 R27 R28 R29 R30 R31 R32 R33 R34 R36 R37 R38 R39 R40 R42 R44 R46 R50 R51 R52 R65: library part RES1
R3 R6 R7: library part Res2, "Resistor"
U3: library part STM32L100R8T6, "ARM Cortex-M3 32-bit MCU, 64 KB Flash, 8 KB Internal RAM, 51 I/Os, 64-pin LQFP, -40 to 85 degC, Tray"
U5: library part SIM68MB
U8: library part SAFFB1G56KBOFA
U10: library part bq2410
U12 U17: library part REF3012
Y1 Y2: library part XTAL, "Crystal Oscillator"

## Via types
v1: diameter 20, hole 12, Top Layer to Bottom Layer, tented both sides, 204 vias
v2: diameter 30, hole 20, Top Layer to Bottom Layer, tented both sides, 25 vias
v3: diameter 40, hole 25, Top Layer to Bottom Layer, tented both sides, 7 vias

## Nets (pads, with @x,y where several pads share a name; then routed paths per layer and width w, separated by ;. In a path a pad name is that pad's centre, name@x,y a point inside that pad or via, vN(x,y) a via of type N, cw(c..) or ccw(c..) an arc to the next point about the centre after c; other vN are vias at no path point)
2.5V: C1.1 C9.2 U3.13 U12.2 | length 590.4
  Top Layer w8: U3.13@-257.01,-921.26 v1@-202.64,-921.26
  Mid-Layer 2 w20: v1(-202.64,-920.99) -172.86,-891.22 -172.86,-729.27 v1(-193.67,-708.46)
  Bottom Layer w20: C1.1@-257.87,-454.74 -257.87,-499.56 C9.2@-261.16,-502.85 -284.73,-526.42 U12.2@-284.73,-558.43 -193.67,-649.49 v1(-193.67,-708.46)
AGND: BATT.1 C1.2 C2.1 C3.2 C4.1 C5.2 C6.1 C7.2 C8.1 C9.1 C11.1 C12.1 C13.1 C14.1 C15.1 C16.1 C17.1 C18.1 C23.1 C24.1 C25.1 C27.2 C28.2 C29.2 C31.2 C32.1 C33.1 C34.2 C35.1 C37.2 C38.1 C40.2 C41.1 C43.1 C44.2 C46.2 C47.2 C48.2 C50.1 D2.1 D3.1 D4.1 J1.2 J2.2 P7.3 Q2.2 Q3.1 Q4.2 Q5.3 Q9.2 Q11.2 Q13.2 R3.2 R4.2 R5.2 R9.2 R11.2 R13.2 R15.1 R20.1 R38.1 R52.1 T6.1 T7.1 T8.1 T13.1 T14.1 T16.1 T20.1 U1.2 U1.17 U1.18 U1.29 U1.39 U1.45 U1.46 U1.54 U1.58 U1.59 U1.61 U1.62 U1.63 U1.64 U1.65 U1.69 U1.70 U1.71 U1.72 U1.73 U1.74 U1.75 U1.76 U1.77 U1.78 U1.79 U1.80 U1.81 U1.82 U1.83 U1.84 U1.85 U1.86 U1.87 U1.88 U3.12 U3.18 U3.31 U3.47 U3.63 U5.1 U5.10 U5.12 U8.2 U8.3 U8.5 U9.1 U9.2 U10.3 U10.11 U11.1 U12.3 U13.6 U13.8 U14.1 U14.2 U14.3 U14.6 U14.7 U15.3 U15.5 U15.8 U15.9 U16.10 U17.1 U18.A2 U18.C2 U19.4 Y2.2 Y2.4 | length 2838.6
  Top Layer w6: v1(-1256.58,-1098.02) -1256.58,-1104.58 -1195.98,-1165.18 R38.1@-1195.98,-1186.52 ; C13.1@-884.59,-1156.45 -859.81,-1131.67 -801.58,-1131.67 -795.45,-1137.8 U3.47@-749.13,-1137.8 ; C12.1@-81.68,-1244.83 -62.96,-1244.83 -47.39,-1260.41 -47.39,-1287.64 -38.21,-1296.81 15.59,-1296.81 24.59,-1287.8 C7.2@24.59,-1267.08 ; v1(238.05,-531.97) U5.10@290.75,-531.97 ; U8.3@264.99,-610.63 U8.2@264.99,-591.93 U8.5@287.63,-591.93 v1(306.08,-591.93)
  Top Layer w10: v1(-1312.17,-620.4) U14.2@-1289.22,-620.4 ; v1(-1304.72,-300.4) -1304.72,-311.41 U15.8@-1289.23,-326.9 U15.9@-1289.23,-346.59 ; U14.3@-1289.22,-640.08 U14.1@-1289.22,-600.71 ; U13.8@-1246.71,-888.63 -1246.71,-898.98 -1236.89,-908.81 U13.6@-1226.54,-908.81 -1202.87,-908.81 -1188.07,-894 C40.2@-1173.9,-894 ; U15.3@-1229.19,-366.27 -1229.19,-381 v1(-1213.74,-396.45) ; U15.5@-1229.19,-326.9 -1223.29,-321.01 v1(-1223.29,-298.38) ; C41.1@-1225.02,-754.71 -1225.02,-754.1 -1264.41,-714.71 -1264.41,-694.49 -1243.94,-674.02 U14.6@-1243.94,-666.07 U14.7@-1224.26,-666.07 ; C38.1@-1168.7,-754.17 -1168.7,-772.1 -1168.7,-810.7 v1(-1138.08,-841.32) ; v1(-765.4,-712.95) -734.72,-712.95 -646.53,-712.95 -631.02,-728.45 U3.31@-631.02,-763.78 ; U3.47@-749.13,-1137.8 -672.72,-1137.8 v1(-641.51,-1169) ; v1(-428.89,-1170.46) -375.12,-1224.22 U3.63@-375.12,-1255.91 ; U3.18@-375.12,-763.78 -375.12,-828.79 -364.62,-839.28 -345.37,-839.28 v1(-333.03,-826.95) ; v1(-306.14,-946.99) -300.1,-940.95 U3.12@-257.01,-940.95 ; U9.2@115.52,-622.78 U9.1@115.52,-603.09 115.52,-547.04 v1(122.64,-539.93) ; v1(162.86,-666.57) 174.33,-655.1 C25.1@195.21,-655.1
  Bottom Layer w6: v1(-1256.58,-1098.02) -1256.58,-1104.58 -1241.36,-1119.8 ; -1249.83,-1111.33 -1241.36,-1119.8 ; U18.C2@-1229.4,-1131.76 -1241.36,-1119.8
  Bottom Layer w8: U10.11@-1022.79,-984.15 U10.3@-1022.79,-940.85 ; v1(-170.76,-1.78) -162.46,6.52 C16.1@-138.35,6.52 ; C14.1@-104.98,-144.5 -104.98,-95.23 C18.1@-102.61,-92.86 -82.29,-92.86 v1(-72.1,-103.05)
  Bottom Layer w10: v1(-1283.25,-486.02) -1274.28,-495 -1252.27,-495 -1234.6,-477.33 U19.4@-1214.01,-477.33 ; R9.2@-1245.23,104.07 -1224.12,82.97 v1(-1224.12,73.95) ; U18.A2@-1197.91,-1131.76 -1138.23,-1072.09 C46.2@-1138.23,-1065.97 ; R20.1@-1078.73,-474.85 -1078.73,-419.48 C47.2@-1093.19,-405.02 v1(-1046.62,-405.02) ; Q11.2@-1026.47,-590.95 -1026.47,-516.8 v1(-1004,-494.33) ; v1(-461.04,-1056.96) -439.81,-1056.96 ; v1@-452.46,-1056.96 -439.81,-1056.96 ; v1(-431.5,-917.39) -431.5,-883.99 -412.57,-865.06 -406.69,-865.06 ; -409.63,-868 -406.69,-865.06 ; C8.1@-393.44,-1056.96 -439.81,-1056.96 ; R5.2@-391.58,-913.06 -391.58,-880.17 -406.69,-865.06 ; C3.2@-390.95,-865.06 -406.69,-865.06 ; C37.2@-245.36,-689.17 -245.36,-701.15 v1(-205,-741.51) ; U12.3@-186.31,-597.8 v1(-161.79,-573.28)
  Bottom Layer w30: T16.1@-779.68,-1364.69 -779.68,-1324.11 D4.1@-733.28,-1277.71
  other v1: -921.58,-1383.02 -669.91,-1379.76 -1157.58,-1358.02 -1178.58,-1327.02 -678.58,-1316.02 -1028,-1281 -1298.58,-1255.02 -680.58,-1255.02 189.42,-1250.02 140.42,-1248.02 261.42,-1244.02 87.42,-1136.02 -622.58,-1093.02 75.42,-1068.02 -1321.05,-1051.22 -573.58,-1031.02 -186.58,-1030.02 -611.58,-990.02 -1042.48,-984.15 -188.58,-966.02 -1137.58,-871.02 -7.58,-865.02 -1081.58,-855.02 -209.58,-845.02 69.42,-843.02 258.42,-791.02 -71.58,-789.02 75.42,-783.02 -216.58,-781.02 -286.58,-779.02 -874.58,-765.02 -1256.67,-722.44 -966.78,-713.5 -761.58,-594.02 -910.58,-465.02 -313.58,-333.02 57.21,-321.84 120.41,-298.9 173.52,-293.55 -328.58,-280.02 123.25,-201.74 -864.58,-190.02 -693.58,-185.02 -909.58,-151.02 -384.58,-150.02 -467.58,-136.02 -298.58,-116.02 -762.58,-110.02 109.72,-107.76 286.42,-105.02 210.63,-90.47 -460.58,-86.02 -763.58,-49.02 279.42,-29.02 -1263.58,8.98 -765.58,8.98 -1312.58,9.98 -1222.58,22.98 -763.58,66.98 244.42,107.98 -765.58,113.98 42.42,139.98 124.42,145.98 -763.58,169.98 -7.58,180.98 179.42,212.98 34.42,213.98 -61.58,232.98
  other v2: -696.58,-535.84 -986.02,-345.22 -661.28,-341.08 -964.25,-193.84 -806.32,-193.03 -999.58,-52.5 -691.76,97.08 -998.85,102.12
  other v3: -1060.83,-1337.21
CS: U3.50 U16.7 | length 1032.3
  Top Layer w6: U3.50@-631.02,-1282.38 U3.50@-631.02,-1255.91 -631.02,-1204.46 -613.58,-1187.02 v1(-613.58,-1163.02)
  Mid-Layer 1 w6: v1(-613.58,-1163.02) -557.58,-1107.02 -65.13,-1107.02 14.67,-1027.22 14.67,-952.84 v1(-48.92,-889.25)
  Bottom Layer w6: U16.7@-105.82,-889.25 v1(-48.92,-889.25)
DM: T2.1 U1.28 | length 597
  Top Layer w8: v1(-264.37,-139.65) U1.28@-234.46,-139.65
  Mid-Layer 2 w8: v1(-264.37,-139.65) -187.75,-216.27 -124.35,-216.27 2.74,-89.19 20.46,-71.47 83,-71.47 92.4,-71.47 136.13,-27.74 136.13,-14.13 122.41,-0.41 v1(98.64,-0.41)
DP: T3.1 U1.27 | length 688.4
  Top Layer w8: v1(-285.87,-159.7) -266.56,-179.02 U1.27@-234.46,-179.02
  Mid-Layer 2 w8: v1(-285.87,-159.7) -205.64,-239.94 -120.4,-239.94 32.64,-86.9 103.1,-86.9 156,-34 156,-16 172,0 v1(200,0)
DTR: Q7.3 R32.1 U1.3 | length 403.8
  Top Layer w10: U1.3@-915.57,-663.27 -915.57,-641.18 -909.19,-634.81 ; v1@-865.17,-590.79 -909.19,-634.81 ; v1(-858.43,-584.05) -909.19,-634.81
  Bottom Layer w10: v1(-858.43,-584.05) -747.66,-473.28 R32.1@-747.66,-445.55 -746.82,-444.71 Q7.3@-746.82,-391.59
EN_3V8: R52.2 U3.36 U19.2 | length 718.3
  Top Layer w8: v1@-887.3,-882.35 v1(-887.3,-877.67) -843.71,-921.26 U3.36@-749.13,-921.26
  Bottom Layer w8: U19.2@-1194.01,-530.9 -1194.01,-579.44 R52.2@-1212.83,-598.26 -1198.21,-612.87 -1198.21,-682.85 -1057.35,-823.71 -1020.68,-860.38 -904.59,-860.38 v1(-887.3,-877.67)
EN_5V: R38.2 U3.45 U18.C1 | length 905.7
  Top Layer w8: v1@-1255.59,-1150.86 v1(-1258.94,-1147.51) -1258.94,-1162.94 R38.2@-1235.35,-1186.52 ; U3.45@-749.13,-1098.43 -703.45,-1098.43 v1(-663.62,-1058.6)
  Mid-Layer 1 w8: v1(-1258.94,-1147.51) -1209.07,-1147.51 -1153.58,-1092.02 -1078.58,-1092.02 -994.58,-1176.02 -748.7,-1176.02 -663.62,-1090.95 v1(-663.62,-1058.6)
  Bottom Layer w8: v1(-1258.94,-1147.51) U18.C1@-1229.4,-1147.51
EN_5V1: R37.2 U3.35 | length 513.4
  Top Layer w8: v1(-880.12,-847.99) -826.54,-901.58 U3.35@-749.13,-901.58
  Mid-Layer 1 w8: v1(-1090.53,-752.28) -975.83,-752.28 v1(-880.12,-847.99)
  Bottom Layer w8: R37.2@-1165.03,-673.01 -1165.03,-677.78 v1(-1090.53,-752.28)
EN_5V2: R51.2 U3.37 | length 640.3
  Top Layer w8: v1(-909.94,-892.62) -861.61,-940.95 U3.37@-749.13,-940.95
  Bottom Layer w8: R51.2@-1295.73,-776.31 -1271.51,-800.53 -1207.93,-800.53 -1177.17,-769.77 -1130.84,-769.77 -1093.23,-807.38 -1023.75,-876.86 -925.69,-876.86 v1(-909.94,-892.62)
LNA_EN: U5.13 U9.5 | length 369.1
  Top Layer w8: U9.5@135.21,-622.78 148.02,-622.78 v1(162.58,-637.34) ; v1(236.8,-407) 239.5,-404.3 U5.13@290.75,-404.3
  Mid-Layer 2 w8: v1(162.58,-637.34) 162.58,-447.92 203.51,-407 v1(236.8,-407)
MDTR: Q7.2 U3.21 | length 1119.1
  Top Layer w10: v1(-476.02,-863.75) -448.07,-863.75 -434.17,-849.86 U3.21@-434.17,-763.78
  Mid-Layer 2 w10: v1(-677.95,-293.16) -537.26,-293.16 -497.84,-332.58 -497.84,-598.58 ; -497.84,-817.87 -497.84,-598.58 ; v1(-476.02,-863.75) -497.84,-841.93 -497.84,-598.58
  Bottom Layer w10: Q7.2@-707.45,-293.16 v1(-677.95,-293.16)
MISO: U3.44 U16.8 | length 1110.8
  Top Layer w6: U3.44@-749.13,-1078.74 -716.87,-1078.74 -657.72,-1019.59 v1@-619.05,-1019.59
  Mid-Layer 1 w6: v1(-618.46,-1020.18) -550.62,-1088.02 -67.73,-1088.02 0.06,-1020.24 0.06,-965.51 -77.06,-888.39 -77.06,-867.4 v1(-48.92,-839.25)
  Bottom Layer w6: U16.8@-105.82,-839.25 v1(-48.92,-839.25)
MOSI: U3.57 U16.15 | length 902.9
  Top Layer w6: U3.57@-493.23,-1255.91 -493.23,-1324.54 v1(-481.25,-1336.51)
  Mid-Layer 1 w6: v1(-481.25,-1336.51) -386.84,-1242.11 -41.92,-1242.11 34.91,-1165.28 154.18,-1165.28 v1(180.2,-1139.25)
  Bottom Layer w6: v1(180.2,-1139.25) U16.15@254.42,-1139.25
MRI: Q6.3 R30.1 U3.22 | length 548.1
  Top Layer w10: v1(-454.39,-839.51) -453.86,-838.98 U3.22@-453.86,-763.78
  Mid-Layer 2 w10: v1(-454.39,-839.51) -468.52,-825.37 -468.52,-513.62 v1(-449.48,-494.58)
  Bottom Layer w10: v1(-449.48,-494.58) -424.51,-469.61 R30.1@-424.51,-442.32 -423.42,-441.24 Q6.3@-423.42,-391.84
NBIOT_GRXD: U3.17 U5.2 | length 852.8
  Top Layer w10: U3.17@-355.43,-763.78 -342.34,-763.78 -329.58,-751.02 v1(-329.58,-725.02) ; U5.2@-91.14,-228.82 4.06,-228.82 v1(25.26,-250.01)
  Mid-Layer 2 w10: v1(-329.58,-725.02) -329.58,-686.02 -269.95,-626.39 -269.95,-552.01 -82.73,-364.79 -82.73,-288.46 -34.93,-240.66 15.9,-240.66 v1(25.26,-250.01)
NBIOT_GTXD: U3.16 U5.3 | length 768.8
  Top Layer w10: U3.16@-257.01,-862.21 -257.01,-767.35 v1@-236.46,-746.8 ; U5.3@-91.14,-272.13 v1(-12.67,-272.13)
  Mid-Layer 2 w10: v1(-236.68,-745.74) -236.68,-665.02 -198.33,-626.67 -198.33,-580.28 -12.67,-394.62 v1(-12.67,-272.13)
NBIOT_NRXD: Q18.3 R42.1 U3.59 | length 1370
  Top Layer w10: U3.59@-453.86,-1255.91 -453.86,-1193.57 v1(-453.79,-1193.51)
  Mid-Layer 1 w10: v1@-453.86,-1192.58 -17.45,-1192.58 v1(27.56,-1147.57)
  Mid-Layer 2 w10: v1(8.02,-478.66) -14.53,-501.21 -14.53,-605.04 27.56,-647.14 v1(27.56,-1147.57)
  Bottom Layer w10: v1@9.37,-479.39 Q18.3@52.78,-479.39 52.78,-445.17 63.87,-434.08 R42.1@63.87,-415.57
NBIOT_NTXD: Q20.2 U3.58 | length 1160
  Top Layer w10: U3.58@-474.15,-1257.92 v1(-474.15,-1176.64)
  Mid-Layer 2 w10: v1(-553.24,-351.46) -537.41,-367.28 -537.41,-613.19 -678.58,-754.36 -678.58,-833.02 -718.58,-873.02 -718.58,-954.99 -625.07,-1048.51 -570.77,-1102.8 -547.98,-1102.8 v1(-474.15,-1176.64)
  Bottom Layer w10: v1(-553.24,-351.46) -537.41,-335.63 Q20.2@-537.41,-300.63
NET: J1.1 U1.60 | length 131.1
  Top Layer w20: J1.1@-1228.31,-145.35 -1189.11,-184.55 ccw(c-1188.38,-183.82) -1188.38,-184.85 -1176.49,-196.74 ccw(c-1124.23,-144.48) U1.60@-1124.23,-218.39
NET_LIGHT: LED1.1 U1.52 | length 190.9
  Top Layer w8: LED1.1@-1231.31,117.99 -1180.06,169.24 -1141.36,169.24 -1124.23,152.11 U1.52@-1124.23,96.57
NetBATT_2: BATT.2 R7.2 U3.1 | length 404.6
  Top Layer w10: v1(-328.3,-1217.75) -328.3,-1185.85 -299.94,-1157.48 U3.1@-257.01,-1157.48
  Bottom Layer w20: -603.03,-1226.82 -589.54,-1240.31 BATT.2@-475.57,-1240.31 -350.86,-1240.31 v1(-328.3,-1217.75)
NetC2_2: C2.2 R18.2 | length 44.3
  Bottom Layer w8: R18.2@-91.14,-352.88 -90.43,-353.59 C2.2@-47.09,-353.59
NetC3_1: C3.1 R2.2 R5.1 U3.8 | length 234.5
  Top Layer w10: v1@-352.86,-945.04 -352.86,-990.29 -323.46,-1019.69 U3.8@-257.01,-1019.69
  Bottom Layer w10: v1(-353.86,-945.31) -353.86,-914.72 R5.1@-352.21,-913.06 -352.21,-865.69 C3.1@-351.58,-865.06
NetC4_2: C4.2 R1.1 U3.5 Y2.1 | length 608.1
  Top Layer w6: U3.5@-257.01,-1078.74 -173.2,-1078.74 -54.23,-959.77 39.46,-959.77 R1.1@53.39,-973.71 144.39,-973.71 Y2.1@187.54,-1016.86 249.34,-1016.86 C4.2@269.7,-996.5
NetC5_1: C5.1 U3.4 Y1.2 | length 319.1
  Top Layer w6: U3.4@-257.01,-1098.43 -151.03,-1098.43 -106.29,-1143.17 -82.57,-1143.17 -57.31,-1117.91 Y1.2@-34.18,-1117.91 -34.18,-1080.36 C5.1@-13.19,-1059.37
NetC6_2: C6.2 R1.2 U3.6 Y2.3 | length 521.4
  Top Layer w6: U3.6@-257.01,-1059.06 U3.6@-253.68,-1059.06 ; U3.6@-256.07,-1061.45 U3.6@-253.68,-1059.06 ; C6.2@120.7,-842.55 120.7,-928.92 Y2.3@120.07,-929.55 58.18,-929.55 R1.2@53.39,-934.34 47.98,-934.34 35.94,-946.38 -58.82,-946.38 -171.5,-1059.06 U3.6@-253.68,-1059.06
NetC7_1: C7.1 U3.3 Y1.1 | length 332
  Top Layer w6: U3.3@-257.01,-1118.11 -161.81,-1118.11 -120.43,-1159.49 -74.5,-1159.49 -34.18,-1199.8 Y1.1@-34.18,-1202.91 -34.18,-1247.68 C7.1@-14.78,-1267.08
NetC8_2: C8.2 R6.2 U3.7 | length 155
  Top Layer w6: v1(-320.81,-1041.76) -318.42,-1039.37 U3.7@-257.01,-1039.37
  Bottom Layer w6: R6.2@-354.07,-1006.35 C8.2@-354.07,-1056.96 -336.01,-1056.96 v1(-320.81,-1041.76)
NetC22_1: C22.1 U8.4 | length 87.9
  Top Layer w10: C22.1@221.3,-606.07 242.58,-627.36 280.88,-627.36 287.63,-620.61 U8.4@287.63,-610.63
NetC22_2: C22.2 U9.6 | length 48
  Top Layer w10: U9.6@135.21,-603.09 178.94,-603.09 C22.2@181.93,-606.07
NetC27_1: C27.1 D2.2 Q3.3 U10.1 | length 548
  Top Layer w8: C27.1@-1003.45,-1085.29 -958.18,-1130.56
  Mid-Layer 1 w50: v3(-1094.65,-901.39) -1094.65,-988.64 -952.73,-1130.56 v3(-936.4,-1130.56)
  Bottom Layer w15: -1094.65,-930.34 -1084.14,-940.85 U10.1@-1062.16,-940.85
  Bottom Layer w40: -1094.65,-930.34 v3(-1094.65,-901.39)
  Bottom Layer w50: Q3.3@-996.74,-1099.13 -994.53,-1099.13 -963.1,-1130.56 ; v3(-936.4,-1130.56) D2.2@-869.12,-1130.56
NetC40_1: C40.1 U13.5 | length 54.7
  Top Layer w10: U13.5@-1226.54,-928.49 -1203.34,-928.49 -1198.46,-933.37 C40.1@-1173.9,-933.37
NetD1_2: D1.2 R7.1 | length 86
  Bottom Layer w15: R7.1@-563.66,-1210.52 D1.2@-563.66,-1124.52
NetJ2_1: J2.1 L3.2 | length 81.2
  Top Layer w20: J2.1@-11.97,-680.51 -10.08,-682.41 L3.2@68.41,-682.41